# EAGLE board Ej4_EM_inductor (EAGLE 9.7.0)

Size 103.59 x 69.86 mm. Coordinates in mm from the lower left corner, seen from the top.
Outline: 0,0 103.59,0 103.59,69.86 0,69.86 0,0
Copper layers (1*16): Top 0.035mm / dielectric 1.5mm / Bottom 0.035mm
Design rules "default": minimum track width 6mil, minimum drill 0.35mm, track to track 6mil, track to pad 6mil, pad to pad 6mil, via to via 6mil, smd to smd 6mil, copper to edge 40mil, drill to drill 6mil, minimum pad ring 10mil, minimum via ring 8mil, stop-mask expansion 4mil, vias tented up to drill 0mil, thermal gap 10mil

## Footprints (pad centres in the part's own frame; a part is rotated, then mirrored left to right if it is on the bottom)
LEDRD254W60D565H860B = drill 0.981 pad 1.581: 1 -1.27,0; 2 1.27,0
INDRD2743W50D3810H2616B = drill 0.708 pad 1.308: 1 -13.716,0; 2 13.716,0
BATTERY-GENERIC = drill 1.118 pad 3.15 octagon: + 2.54,0; - -2.54,0
RESAD1016W63L850D250B = drill 0.83 pad 1.43: 1 -5.08,0; 2 5.08,0
SWITCH-SPDT-PTH-8.5X3.7MM = drill 1.016 pad 1.88: 1 -2.54,0; 2 0,0; 3 2.54,0

## Placement (x,y rotation side)
D1  RED  [LEDRD254W60D565H860B]  80.5,27.36 180 top
L1  10u  [INDRD2743W50D3810H2616B]  63.99,22.29 270 top
P2  BATTERYGENERIC  [BATTERY-GENERIC]  8.26,47.05 180 top
R1  10k  [RESAD1016W63L850D250B]  79.23,22.29 90 top
S1  TOGGLE  [SWITCH-SPDT-PTH-8.5X3.7MM]  96.17,62.87 0 top

## Library data of the parts
D1 = Tinkercad; CATEGORY: Opto-Electronic; SUB-CATEGORY: LED; VALUE: LED_RED
L1 = Tinkercad; CATEGORY: Inductor; SUB-CATEGORY: Fixed
P2 R1 S1 = Tinkercad

## Nets
D1_C: D1.2 R1.2
P2+: L1.2 P2.+
P2-: P2.- R1.1
S1_S: D1.1 S1.3

## Tracks (layer width: path | path; a pad name or v marks a point on that pad's centre or on a via)
D1_C  (1 unrouted)
P2+  (1 unrouted)
P2-  (1 unrouted)
S1_S  (1 unrouted)